# EAGLE board 555 Oscillator Board (EAGLE 9.4.2)
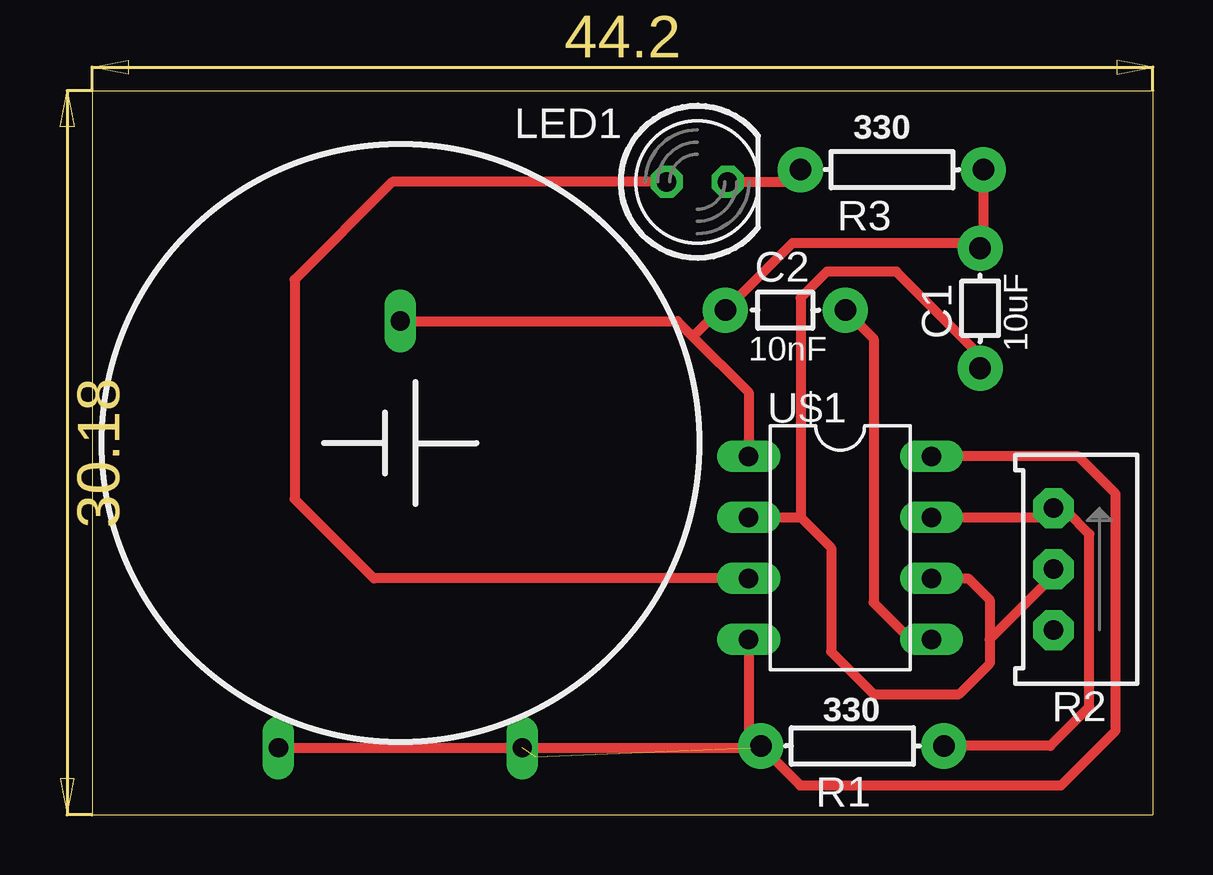
[diagram p0: board, top side]
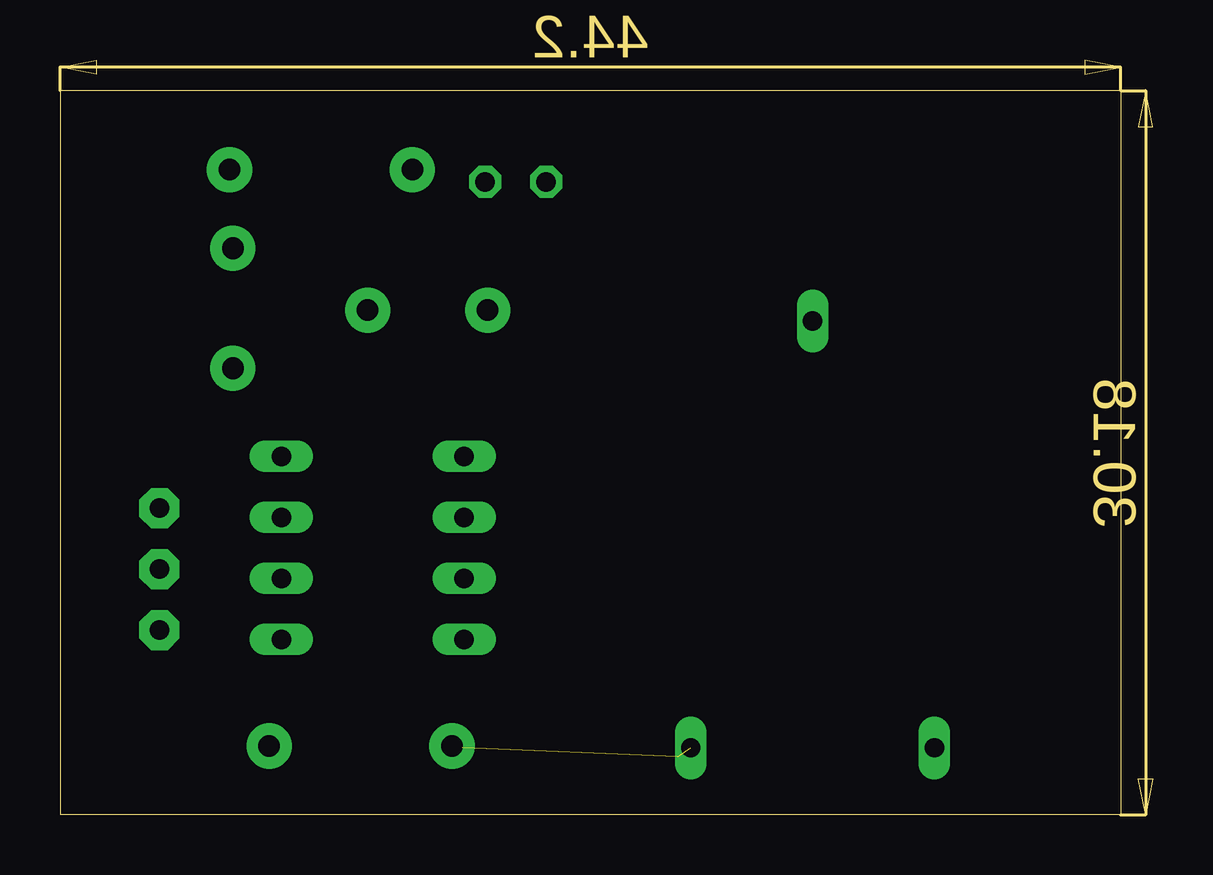
[diagram p1: board, bottom side, seen from below]

Size 44.2 x 30.18 mm. Coordinates in mm from the lower left corner, seen from the top.
Outline: 0,30.18 44.2,30.18 44.2,0 0,0 0,30.18
Copper layers (1*16): Top 0.035mm / dielectric 1.5mm / Bottom 0.035mm
Design rules "default *": minimum track width 6mil, minimum drill 0.35mm, track to track 16mil, track to pad 16mil, pad to pad 16mil, via to via 16mil, smd to smd 16mil, copper to edge 40mil, drill to drill 6mil, minimum pad ring 10mil, minimum via ring 8mil, stop-mask expansion 4mil, vias tented up to drill 0mil, thermal gap 10mil

## Footprints (pad centres in the part's own frame; a part is rotated, then mirrored left to right if it is on the bottom)
AXIAL-5MM = drill 0.9 pad 1.88: P$1 -2.5,0; P$2 2.5,0
LED-5MM = drill 0.813 octagon: A -1.27,0; K 1.27,0
AXIAL-0.3 = drill 0.9 pad 1.88: P$1 -3.81,0; P$2 3.81,0
TRIMPOT_3296 = drill 0.813 pad 1.676 octagon: 1 2.54,1.27; 2 0,1.27; 3 -2.54,1.27
DIL08 = drill 0.813 long: 1 -3.81,-3.81; 2 -1.27,-3.81; 3 1.27,-3.81; 4 3.81,-3.81; 5 3.81,3.81; 6 1.27,3.81; 7 -1.27,3.81; 8 -3.81,3.81
CR-2450/G1AN = drill 0.8 long: +_0 -5.08,12.7; +_1 5.08,12.7; - 0,-5.08

## Placement (x,y rotation side)
C1  10uF  [AXIAL-5MM]  37,21.11 90 top
C2  10nF  [AXIAL-5MM]  28.88,21.03 0 top
LED1  [LED-5MM]  25.21,26.38 0 top
R1  330  [AXIAL-0.3]  31.67,2.87 180 top
R2  [TRIMPOT_3296]  41.33,10.24 90 top
R3  330  [AXIAL-0.3]  33.33,26.89 180 top
U$1  555_TIMER  [DIL08]  31.17,11.12 270 top
U$2  CR-2450/G1AN  [CR-2450/G1AN]  12.84,15.49 180 top

## Library data of the parts
C1 C2 LED1 R1-R3 U$1 U$2 = HyTechDevices

## Nets
N$2: C1.P$2 C2.P$1 R3.P$1 U$1.1 U$2.-
N$3: R1.P$1 R2.1 U$1.7
N$8: R1.P$2 U$1.4 U$1.8 U$2.+_0 U$2.+_1
N$9: LED1.A U$1.3
N$10: LED1.K R3.P$2
N$11: C2.P$2 U$1.5
N$13: C1.P$1 R2.2 U$1.2 U$1.6

## Tracks (layer width: path | path; a pad name or v marks a point on that pad's centre or on a via)
N$2
  Top 0.406: U$2.- 24.38,20.57 24.94,20.02 | U$1.1 27.36,17.6 24.94,20.02 | R3.P$1 37.14,23.75 C1.P$2 36.78,23.82 29.17,23.82 C2.P$1 26.13,21.03 25.11,20.02 24.94,20.02
N$3
  Top 0.406: R1.P$1 39.93,2.87 41.55,4.5 41.55,11.7 40.6,12.65 40.18,12.65 R2.1 39.68,12.39 U$1.7
  Bottom 0.305: 40.18,12.78 R2.1
N$8  (2 unrouted)
  Top 0.406: 27.36,2.36 R1.P$2 | U$1.4 27.36,3.38 27.69,3.04 | 27.69,3.04 R1.P$2 | R1.P$2 29.5,1.23 40.37,1.23 42.65,3.5 42.65,13.37 41.09,14.94 U$1.8 | 27.48,2.49 R1.P$2 | U$2.+_1 27.44,2.79 27.69,3.04
N$9
  Top 0.406: LED1.A 12.51,26.38 8.43,22.3 8.43,13.16 11.73,9.86 U$1.3
N$10
  Top 0.406: R3.P$2 29.01,26.38 LED1.K
N$11
  Top 0.406: C2.P$2 32.56,19.85 32.56,8.84 34.09,7.32 U$1.5
N$13
  Top 0.406: U$1.2 29.51,12.39 | 37.39,7.32 37.39,6.3 36.12,5.03 32.56,5.03 30.79,6.81 30.79,11.12 29.51,12.39 | U$1.6 36.5,9.86 37.39,8.97 37.39,7.32 | R2.2 40.06,9.98 37.39,7.32 | C1.P$1 37,19.14 33.5,22.63 30.61,22.63 29.51,21.54 29.51,12.39